# Altium PCB STM32F103C8T6核心板_2020-09-12_10-31-41.pcbdoc
Units mil, origin at the board's own origin, x right, y up, seen from the top; angles counter-clockwise.
Board outline 1992.5 x 3124 mil, 2 copper layers (Top Layer, Bottom Layer); 1 components, 0 nets, 40 pads, 0 vias.
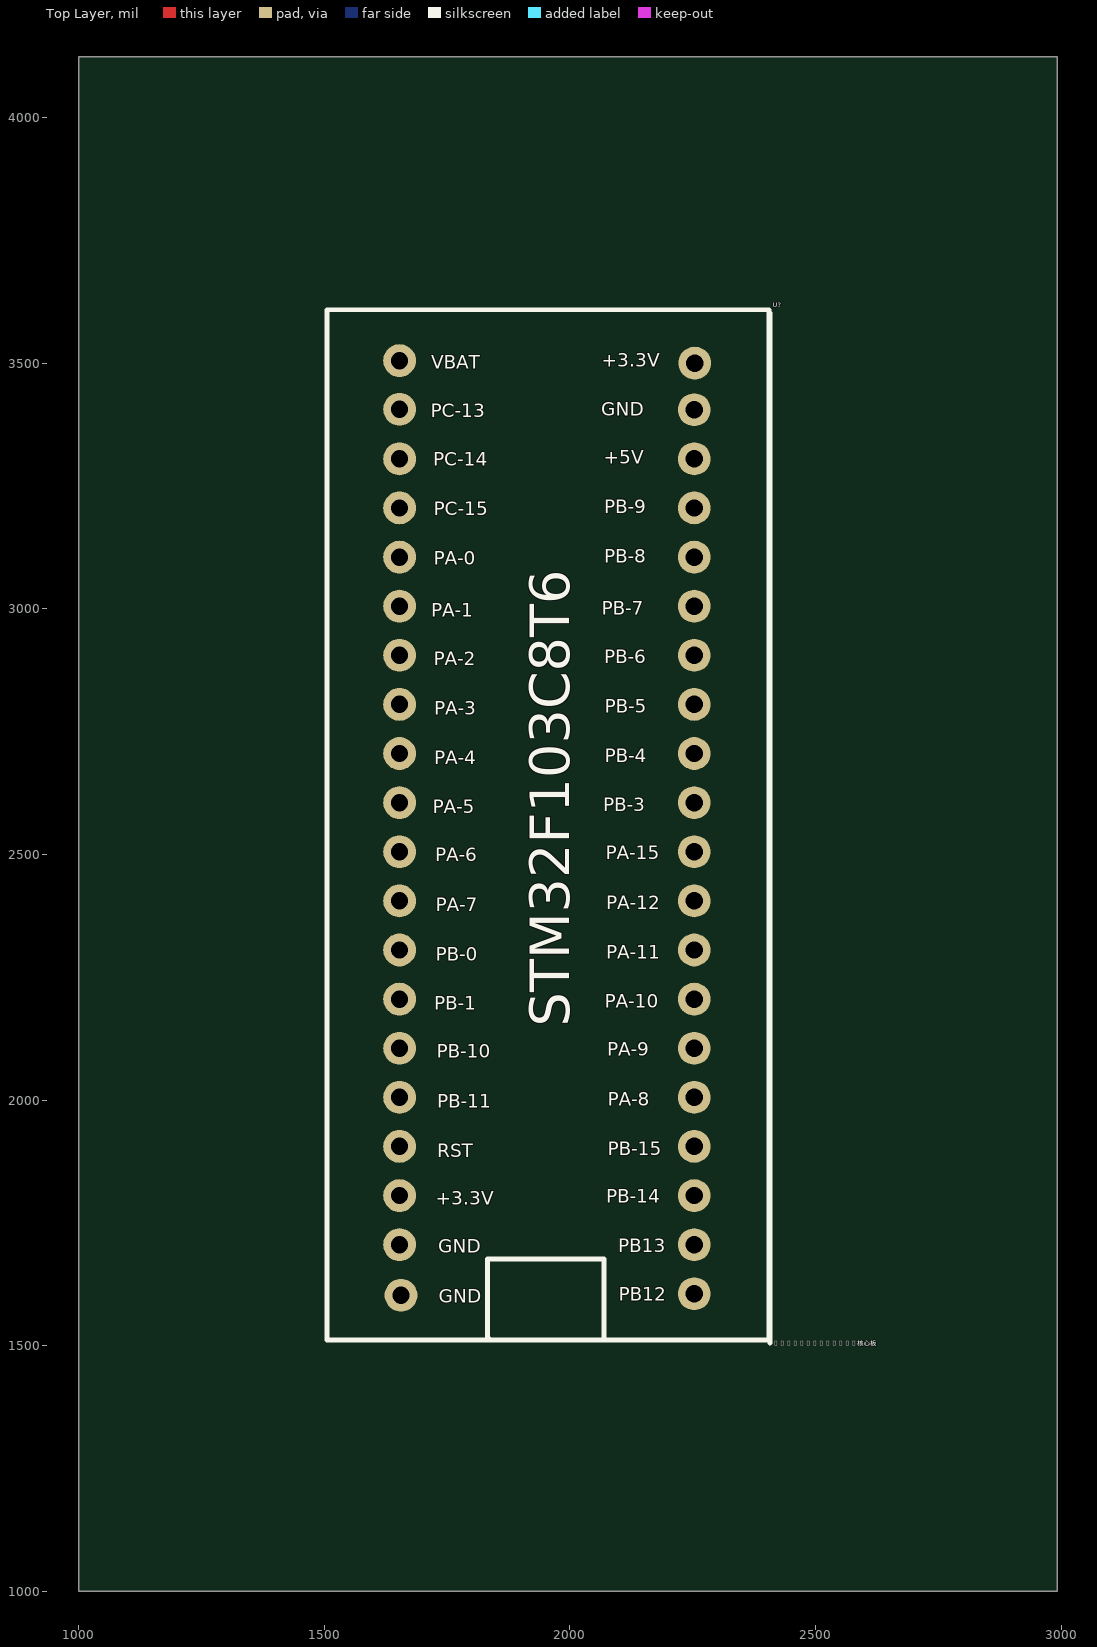
[diagram p0: Top Layer view]
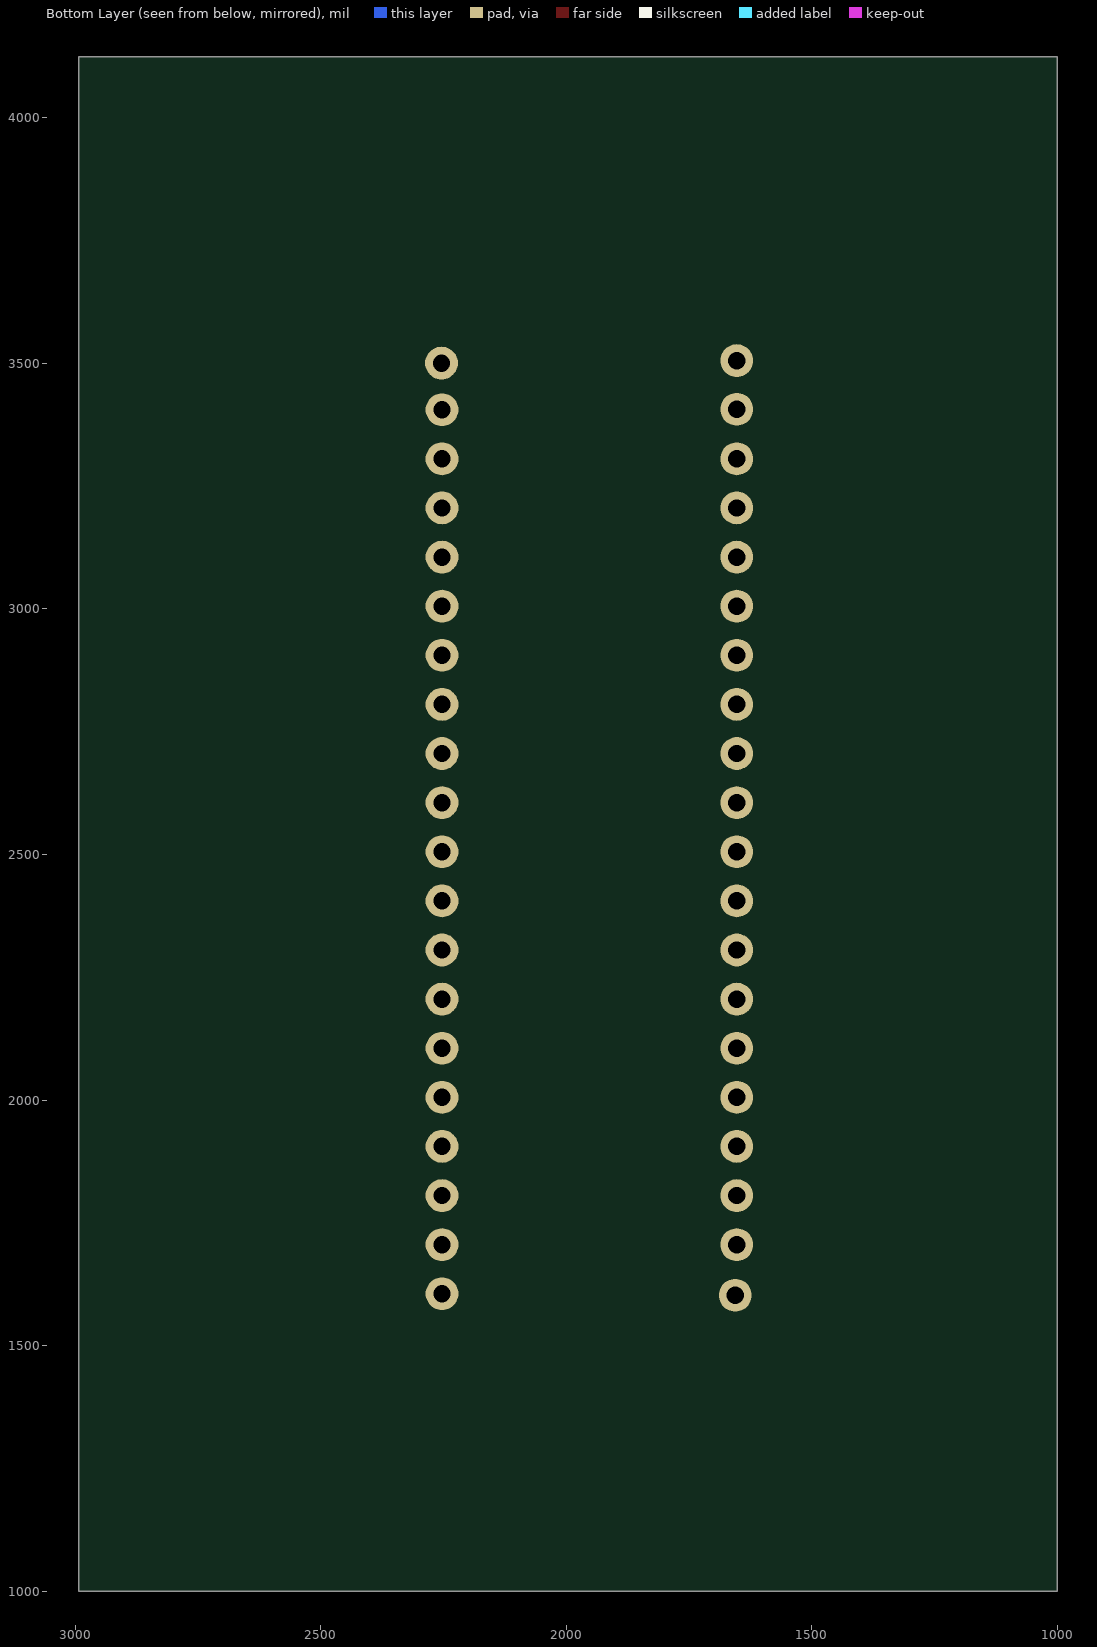
[diagram p1: Bottom Layer view, seen from below]

## Layer stack, top to bottom
Top Layer: signal copper (thickness not stored)
Dielectric: dielectric 12.6, FR-4, Dk 4.8
Bottom Layer: signal copper (thickness not stored)

## Board outline
2992.5,1000 1000,1000 1000,4124 2992.5,4124

## Components (designator, comment, footprint, x,y, rotation, side; value= is the part's Value field where it differs from the comment)
U? "STM32F103C8T6核心板" STM32F103C8T6核心板 1956.25,2557 r0 top

## Footprints (in the part's own frame and the unit in brackets; to place one, negate y for a bottom-side part, rotate by r counter-clockwise, add the part's x,y. Pads: shape width x height; smd on the part's side, far side on the other; paste and mask are expansions set on the pad)
STM32F103C8T6核心板 [mm]
  round 1.7 hole 0.899: 1(-7.703,24.092) 2(-7.703,21.577) 3(-7.703,19.012) 4(-7.703,16.472) 5(-7.703,13.932) 6(-7.703,11.392) 7(-7.703,8.852) 8(-7.703,6.312) 9(-7.703,3.772) 10(-7.703,1.232) 11(-7.703,-1.308) 12(-7.703,-3.848) 13(-7.703,-6.388) 14(-7.703,-8.928) 15(-7.703,-11.468) 16(-7.703,-14.008) 17(-7.703,-16.548) 18(-7.703,-19.088) 19(-7.703,-21.628) 20(-7.626,-24.244) 21(7.537,-24.168) 22(7.537,-21.628) 23(7.537,-19.088) 24(7.537,-16.548) 25(7.537,-14.008) 26(7.537,-11.468) 27(7.537,-8.928) 28(7.537,-6.388) 29(7.537,-3.848) 30(7.537,-1.308) 31(7.537,1.232) 32(7.537,3.772) 33(7.537,6.312) 34(7.537,8.852) 35(7.537,11.392) 36(7.537,13.932) 37(7.537,16.472) 38(7.537,19.012) 39(7.537,21.552) 40(7.563,23.965)
  silkscreen extent -11.46,-26.72 11.46,26.72

## Nets (pads, with @x,y where several pads share a name; then routed paths per layer and width w, separated by ;. In a path a pad name is that pad's centre, name@x,y a point inside that pad or via, vN(x,y) a via of type N, cw(c..) or ccw(c..) an arc to the next point about the centre after c; other vN are vias at no path point)
pads on no net: U?.1 U?.2 U?.3 U?.4 U?.5 U?.6 U?.7 U?.8 U?.9 U?.10 U?.11 U?.12 U?.13 U?.14 U?.15 U?.16 U?.17 U?.18 U?.19 U?.20 U?.21 U?.22 U?.23 U?.24 U?.25 U?.26 U?.27 U?.28 U?.29 U?.30 U?.31 U?.32 U?.33 U?.34 U?.35 U?.36 U?.37 U?.38 U?.39 U?.40

## Silkscreen, mask and mechanical layers (free items; w line width, h text height)
Document:
  lines w0.1: 1995.25,2561 1997.25,2563

## Text inside footprints (layer, text, board x,y; h text height)
U?: Top Overlay "VBAT" at 1718,3488.72 h27.56; Top Overlay "PC-13" at 1717,3389.72 h27.56; Top Overlay "PC-14" at 1722,3291.72 h27.56; Top Overlay "PC-15" at 1723,3190.72 h27.56; Top Overlay "PA-0" at 1723,3089.72 h27.56; Top Overlay "PA-1" at 1718,2983.72 h27.56; Top Overlay "PA-2" at 1723,2885.72 h27.56; Top Overlay "PA-3" at 1724,2784.72 h27.56; Top Overlay "PA-4" at 1724,2683.72 h27.56; Top Overlay "PA-5" at 1721,2583.72 h27.56; Top Overlay "PA-6" at 1726,2485.72 h27.56; Top Overlay "PA-7" at 1727,2384.72 h27.56; Top Overlay "PB-0" at 1727,2283.72 h27.56; Top Overlay "PB-1" at 1724,2183.72 h27.56; Top Overlay "PB-10" at 1729,2085.72 h27.56; Top Overlay "PB-11" at 1730,1984.72 h27.56; Top Overlay "RST" at 1730,1883.72 h27.56; Top Overlay "+3.3V" at 1727,1786.72 h27.56; Top Overlay "GND" at 1732,1688.72 h27.56; Top Overlay "GND" at 1733,1587.72 h27.56; Top Overlay "+3.3V" at 2065,3492.72 h27.56; Top Overlay "GND" at 2064,3393.72 h27.56; Top Overlay "+5V" at 2069,3295.72 h27.56; Top Overlay "PB-9" at 2070,3194.72 h27.56; Top Overlay "PB-8" at 2070,3093.72 h27.56; Top Overlay "PB-7" at 2065,2987.72 h27.56; Top Overlay "PB-6" at 2070,2889.72 h27.56; Top Overlay "PB-5" at 2071,2788.72 h27.56; Top Overlay "PB-4" at 2071,2687.72 h27.56; Top Overlay "PB-3" at 2068,2587.72 h27.56; Top Overlay "PA-15" at 2073,2489.72 h27.56; Top Overlay "PA-12" at 2074,2388.72 h27.56; Top Overlay "PA-11" at 2074,2287.72 h27.56; Top Overlay "PA-10" at 2071,2187.72 h27.56; Top Overlay "PA-9" at 2076,2089.72 h27.56; Top Overlay "PA-8" at 2077,1988.72 h27.56; Top Overlay "PB-15" at 2077,1887.72 h27.56; Top Overlay "PB-14" at 2074,1790.72 h27.56; Top Overlay "PB13" at 2098,1689.72 h27.56; Top Overlay "PB12" at 2099,1591.72 h27.56; Top Overlay "STM32F103C8T6" at 1999,2149.5 h80 r90